# Altium PCB PCB2.PcbDoc
Units mil, origin at the board's own origin, x right, y up, seen from the top; angles counter-clockwise.
Board outline 1742.31 x 1309.24 mil, 2 copper layers (Top Layer, Bottom Layer); 23 components, 20 nets, 68 pads, 0 vias.
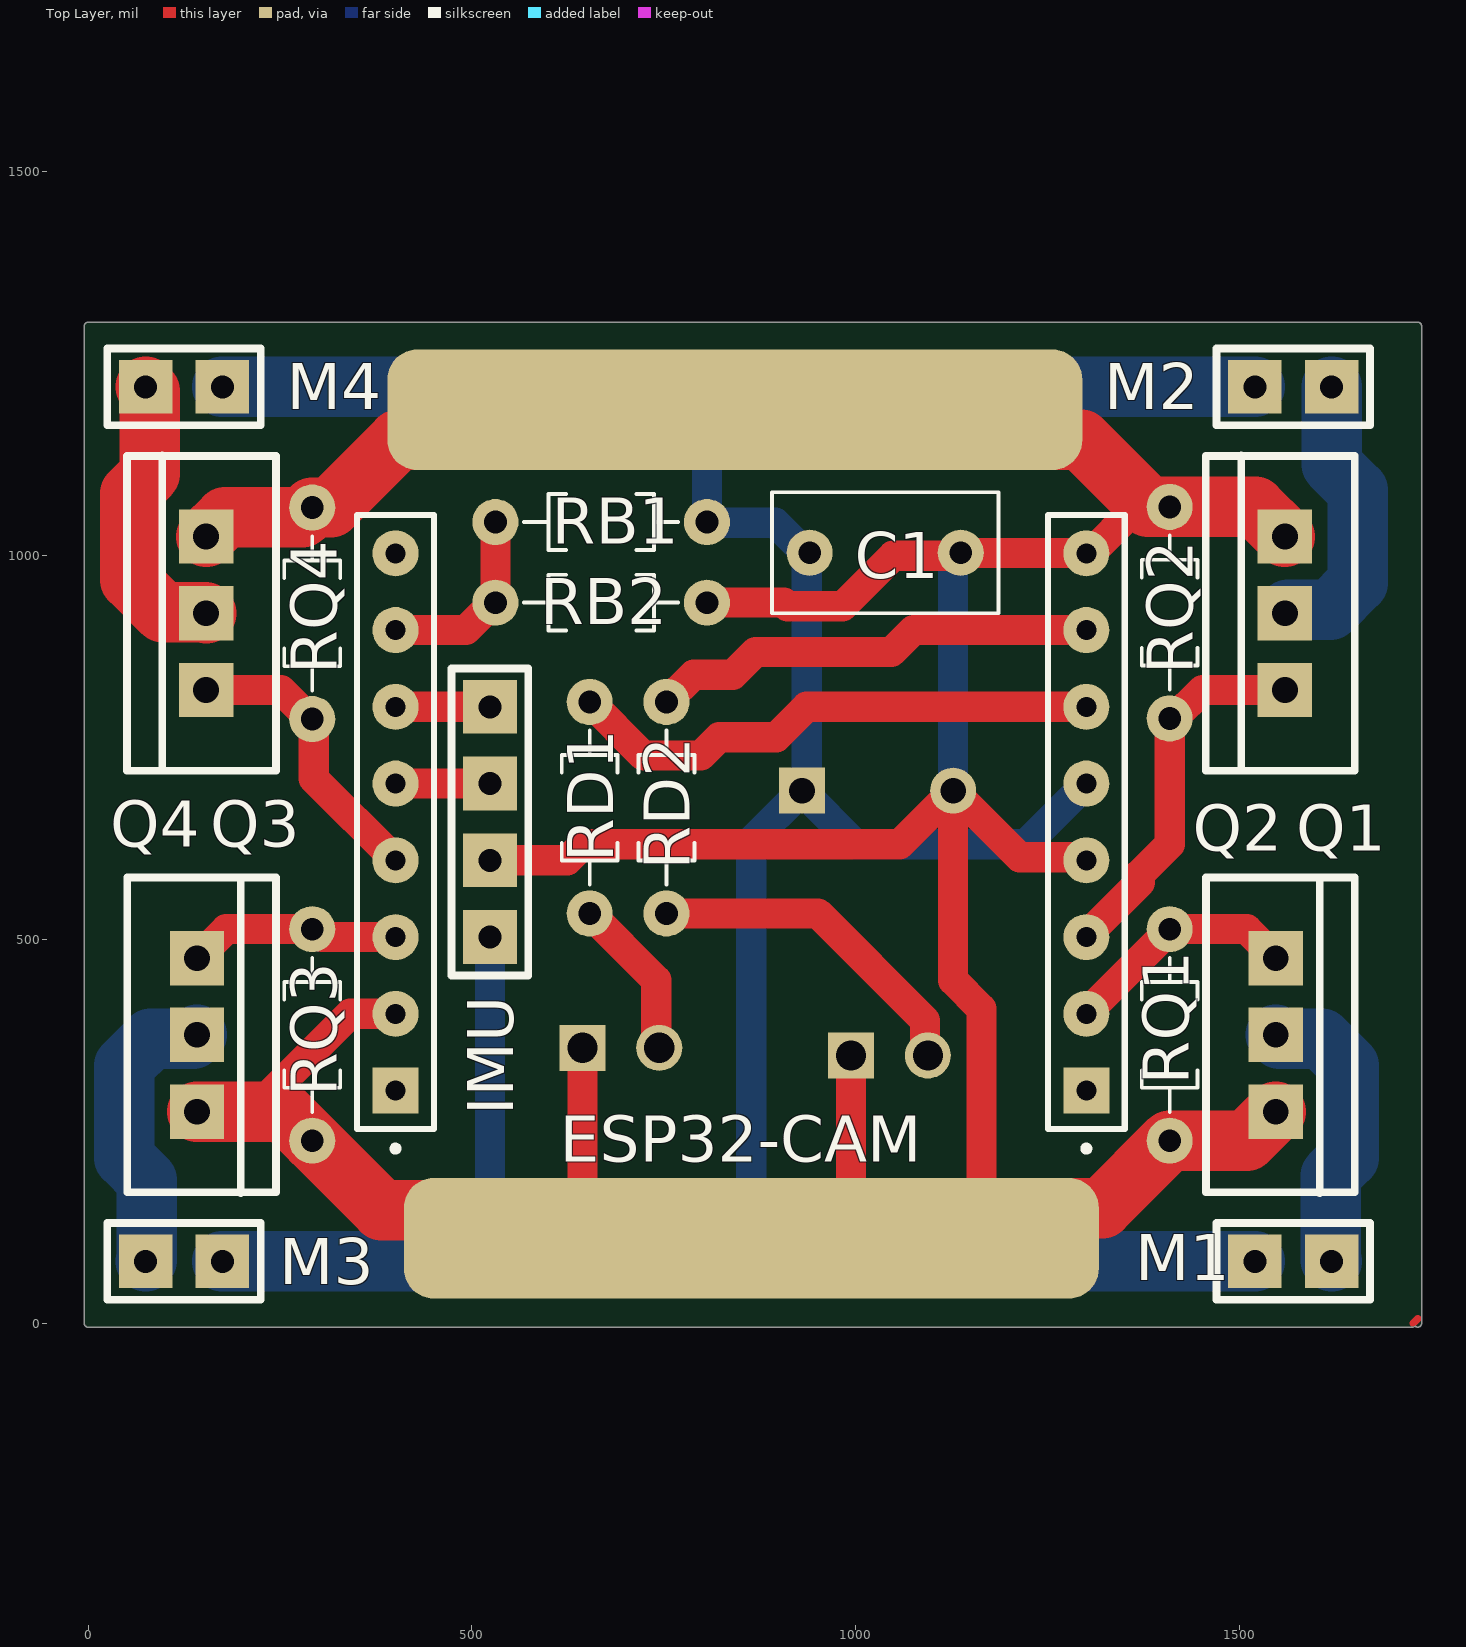
[diagram p0: Top Layer view]
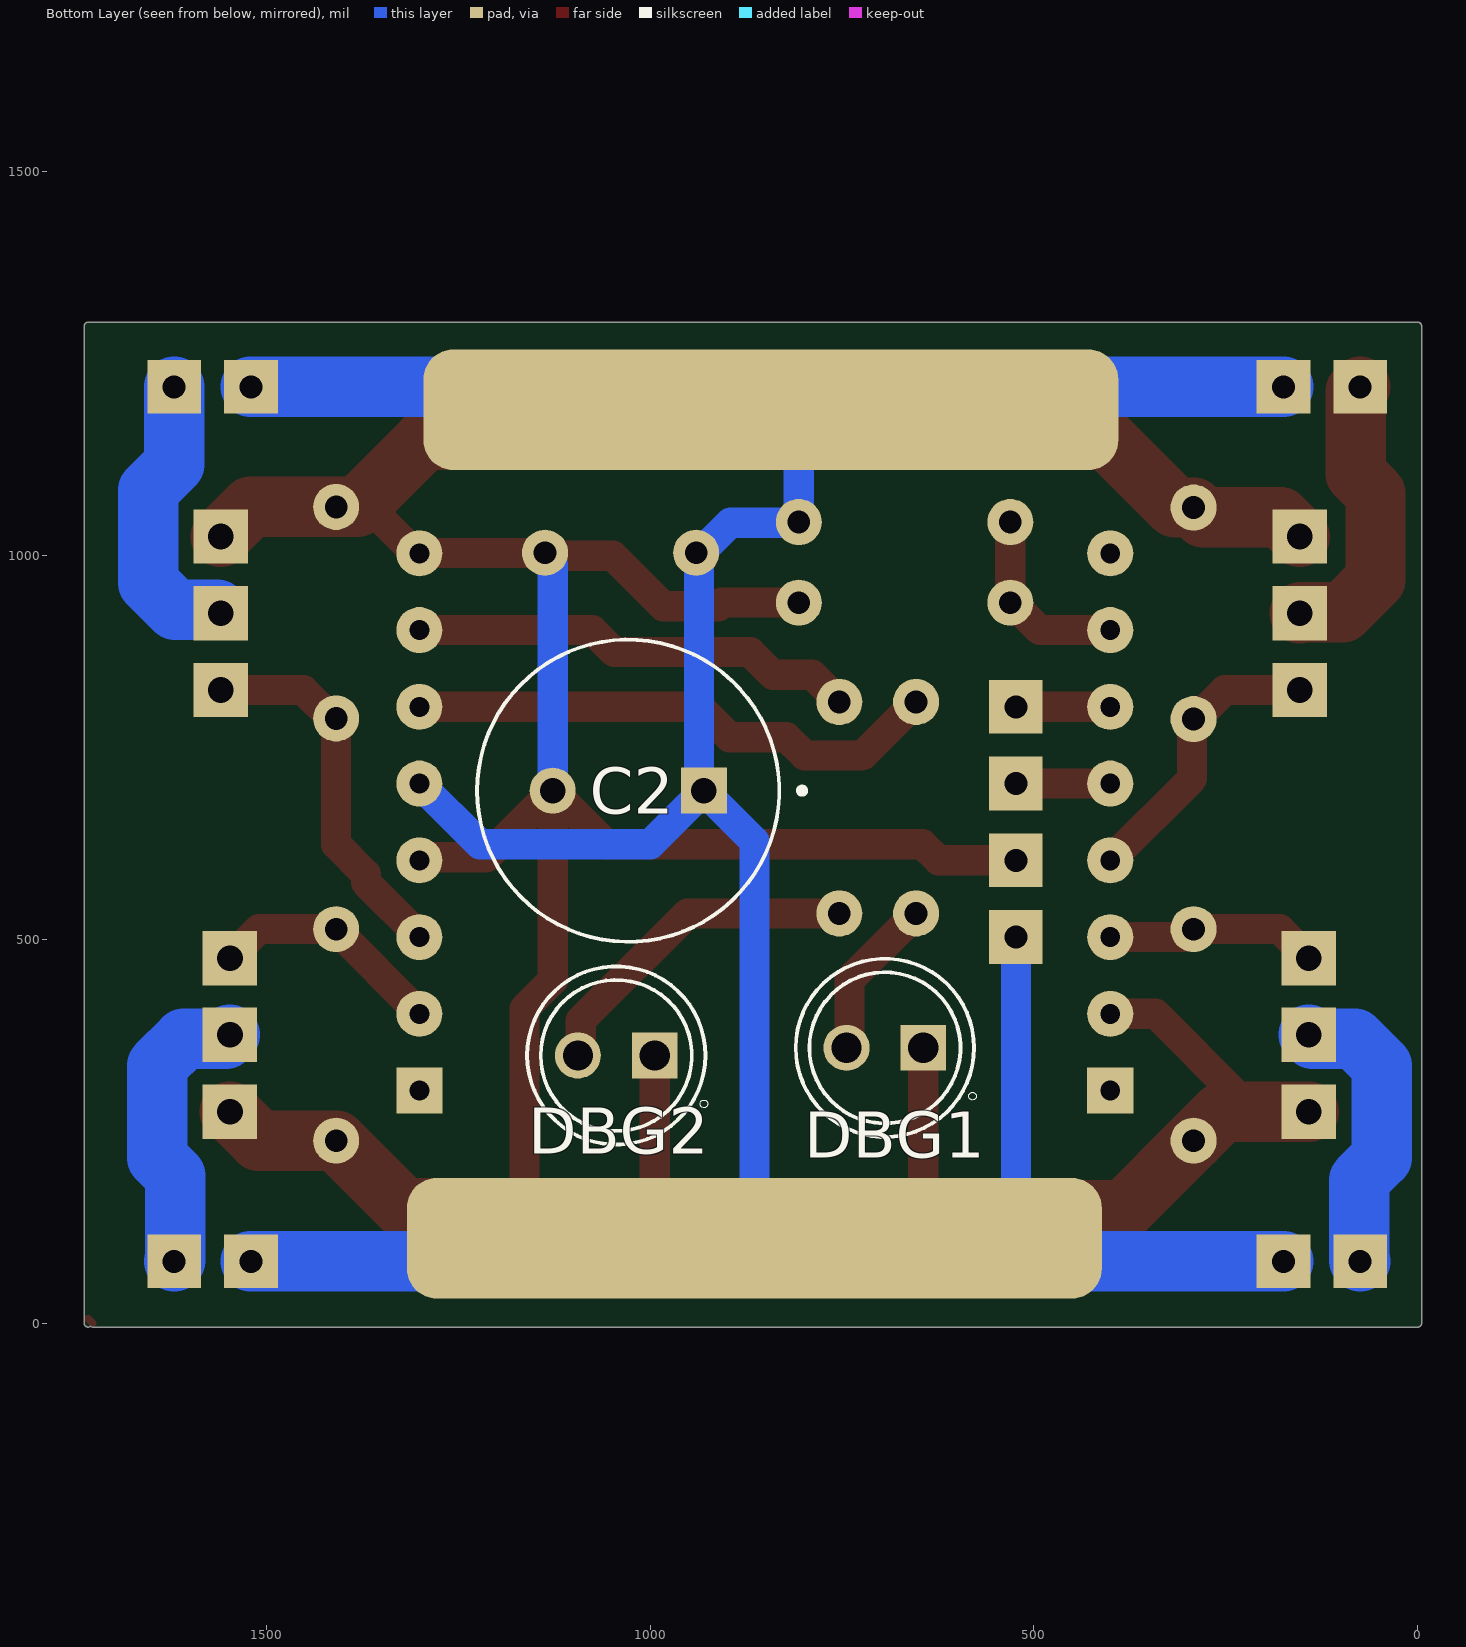
[diagram p1: Bottom Layer view, seen from below]

## Layer stack, top to bottom
Top Solder: solder mask 0.4, Solder Resist, Dk 3.5
Top Layer: signal copper 1.4
Dielectric 1: dielectric 12.6, FR-4, Dk 4.8
Bottom Layer: signal copper 1.4
Bottom Solder: solder mask 0.4, Solder Resist, Dk 3.5

## Board outline
0,-5.01 cw(c0,0) -5.01,0 -5.01,1299.21 cw(c0,1299.21) 0,1304.23 1732.28,1304.23 cw(c1732.28,1299.21) 1737.3,1299.21 1737.3,0 cw(c1732.28,0) 1729.35,-4.07 1726.43,-5.01

## Design rules (kind name [scope] priority, off if disabled: settings)
Clearance [All] p1: gap=20 ignorepadtopadclearanceinfootprint=FALSE
PolygonConnect [All] p1: connectstyle=Relief reliefconductorwidth=10 reliefentries=4 polygonreliefangle="90 Angle" airgapwidth=10
RoutingVias [All] p1: holewidth=28 width=50 viastyle="Through Hole" minholewidth=28 minwidth=50 maxholewidth=28 maxwidth=50
SolderMaskExpansion [All] p1: expansion=4 istentingtop=FALSE
SupplyNets "Schematic Supply Nets" [InNet('GND')] p1: voltage=0.000
Width [All] p1: maxlimit=118.11 minlimit=39.37 preferedwidth=78.74 minimp=50.000000 maximp=50.000000 favimp=50.000000
30 further rules are at their usual default settings.

## Components (designator, comment, footprint, x,y, rotation, side; value= is the part's Value field where it differs from the comment)
C1 "100uF" CAP_RDER73A104K5E1H03A 1038.54,1003.9 r0 top
C2 "100nF" CAPPRD500W60D1000H2000 1028.54,693.9 r0 bottom
DBG1 "WP7113ID" LED_WP7113ID 694.13,358.9 r0 bottom
DBG2 "WP7113ID" LED_WP7113ID 1044.13,348.9 r0 bottom
ESP32-CAM "SS-108-T-2" SAMTEC_SS-108-T-2 400.59,303.15 r270 top
IMU "CONECTOR_4PIN" CON4 523.54,503.15 r90 top
M1 "CONECTOR_2PIN" CON2 1620.13,80.79 r180 top
M2 "CONECTOR_2PIN" CON2 1620.13,1220 r180 top
M3 "CONECTOR_2PIN" CON2 75,80.79 r0 top
M4 "CONECTOR_2PIN" CON2 75,1220 r0 top
Q1 "MOSFET-N" TO220 1547.44,475.79 r270 top
Q2 "MOSFET-N" TO220 1559.25,825 r90 top
Q3 "MOSFET-N" TO220 141.93,475.79 r270 top
Q4 "MOSFET-N" TO220 153.74,825 r90 top
RB1 "920k" RESAD700W45L350D185 668.54,1043.9 r180 top
RB2 "3.3M" RESAD700W45L350D185 668.54,938.9 r0 top
RD1 "110 Ohms" RESAD700W45L350D185 653.54,671.69 r90 top
RD2 "110 Ohms" RESAD700W45L350D185 753.54,671.69 r90 top
RQ1 "10K" RESAD700W45L350D185 1409.13,375.79 r90 top
RQ2 "10K" RESAD700W45L350D185 1409.13,925.79 r270 top
RQ3 "10K" RESAD700W45L350D185 292.05,375.79 r90 top
RQ4 "10K" RESAD700W45L350D185 292.05,925 r270 top
? "SS-108-T-2" SAMTEC_SS-108-T-2 1300.59,303.15 r270 top

## Footprints (in the part's own frame and the unit in brackets; to place one, negate y for a bottom-side part, rotate by r counter-clockwise, add the part's x,y. Pads: shape width x height; smd on the part's side, far side on the other; paste and mask are expansions set on the pad)
CAP_RDER73A104K5E1H03A [mil]
  round 60 hole 29.53: 1(-98.43,0) 2(98.43,0)
  silkscreen extent -148,-79 148,79
CAPPRD500W60D1000H2000 [mil]
  round 60 hole 33.46: N(98.43,0)
  rect 60x60 hole 33.46: P(-98.43,0)
  silkscreen extent -230,-197 197,197, body extent -196,-197 197,197, height 787
CON2 [mil]
  rect 70x70 hole 30: 1(0,0) 2(100,0)
  silkscreen extent -50,-50 150,50, body extent -42,-47 143,45, height 519
CON4 [mil]
  rect 70x70 hole 30: 1(0,0) 2(100,0) 3(200,0) 4(300,0)
  silkscreen extent -50,-50 350,50, body extent -50,-47 343,45, height 519
LED_WP7113ID [mil]
  round 60 hole 39.37: A(50,0)
  rect 59.37x59.37 / inner round 59.37 / far side rect 60x60 hole 39.37: C(-50,0)
  silkscreen extent -119,-116 116,116, body extent -98,-116 116,116, height 378
RESAD700W45L350D185 [mil]
  round 60 hole 29.53: 1(-137.8,0) 2(137.8,0)
  silkscreen extent -100,-36 100,36, body extent -147,-36 147,36, height 73
SAMTEC_SS-108-T-2 [mil]
  rect 60x60 hole 25.98: 01(0,0)
  round 60 hole 25.98: 02(-100,0) 03(-200,0) 04(-300,0) 05(-400,0) 06(-500,0) 07(-600,0) 08(-700,0)
  silkscreen extent -750,-50 80,50
TO220 [mm]
  rect 1.8x1.8 hole 0.85: 1(0,0) 2(2.54,0) 3(5.08,0)
  silkscreen extent -2.67,-2.31 7.77,2.62, body extent -2.41,-2.12 7.49,2.38, height 20.66

## Part data
C1: library part RDER73A104K5E1H03A, "Lead Capacitor X7R_EIA_ with Capacitance: 0.10F and Rated Voltage: 1000Vdc", Package="Radial Murata", Availability=Unavailable, MF=Murata, MP=RDER73A104K5E1H03A, Price=None, SnapEDA_Link=https://www.snapeda.com/parts/RDER73A104K5E1H03A/Murata/view-part/4545952/?ref=snap
C2: library part EEUFC2A470, "47F 100V Aluminum Electrolytic Capacitors Radial, Can", Package="RADIAL-2 Panasonic", Availability="In Stock", Check_prices=https://www.snapeda.com/parts/EEU-FC2A470/Panasonic%20Electronic%20Components/view-part/564661/?ref=eda, MF="Panasonic Electronic", MP=EEU-FC2A470, Price=None, SnapEDA_Link=https://www.snapeda.com/parts/EEU-FC2A470/Panasonic%20Electronic%20Components/view-part/564661/?ref=snap
DBG1 DBG2: "Red 617nm LED Indication - Discrete 2V Radial", Package="Radial Kingbright", Availability="In Stock", Check_prices=https://www.snapeda.com/parts/WP7113ID/Kingbright/view-part/?ref=eda, MF=Kingbright, MP=WP7113ID, Price=None, Purchase-URL=https://pricing.snapeda.com/search/part/WP7113ID/?ref=eda, SnapEDA_Link=https://www.snapeda.com/parts/WP7113ID/Kingbright/view-part/?ref=snap
ESP32-CAM ?: "SS Series .100 Single Row Screw Machine Socket Strip", Package=None, Availability=Bad, Check_prices=https://www.snapeda.com/parts/SS-108-T-2/Samtec/view-part/3323909/?ref=eda, MF=Samtec, MP=SS-108-T-2, Price=None, SnapEDA_Link=https://www.snapeda.com/parts/SS-108-T-2/Samtec/view-part/3323909/?ref=snap
Q1 Q2 Q3 Q4: "N-Channel MOSFET"
RB1 RB2 RD1 RD2 RQ1 RQ2 RQ3 RQ4: library part 3-1623927-1, "1 MOhms Â±5% 0.25W, 1/4W Through Hole Resistor Axial - Carbon Film", Package=None, Check_prices=https://www.snapeda.com/parts/3-1623927-1/TE+Connectivity/view-part/?ref=eda, MF="TE Connectivity", MP=3-1623927-1, SnapEDA_Link=https://www.snapeda.com/parts/3-1623927-1/TE+Connectivity/view-part/?ref=snap

## Free pads (board coordinates)
  rrect50% 905.51x157.48 smd: 25(842.72,1190.2) 25(864.13,110.79)
  rrect50% 905.51x157.48 smd far side: 25(842.72,1190.2) 25(864.13,110.79)

## Nets (pads, with @x,y where several pads share a name; then routed paths per layer and width w, separated by ;. In a path a pad name is that pad's centre, name@x,y a point inside that pad or via, vN(x,y) a via of type N, cw(c..) or ccw(c..) an arc to the next point about the centre after c; other vN are vias at no path point)
3.3V: ?.01
5V: ESP32-CAM.01
GND: ?.04 ?.08 C1.2 C2.N DBG1.C DBG2.C ESP32-CAM.02 IMU.2 pad.25@842.72,1190.2 pad.25@864.13,110.79 Q1.3 Q2.3 Q3.3 Q4.3 RB2.2 RQ1.1 RQ2.1 RQ3.1 RQ4.1 | length 6377.1
  Top Layer w39.37: 214.13,275.79 234.19,295.85 341.5,403.15 ESP32-CAM.02 ; IMU.2 624.25,603.15 645.31,624.21 1057.28,624.21 C2.N ; pad.25@644.13,168.34 DBG1.C ; RB2.2 906.57,938.9 911.25,934.21 982.96,934.21 1048.7,999.95 1133.02,999.95 C1.2 1137.34,1003.52 1300.22,1003.52 ?.08 1306.17,1003.15 1362.66,1059.64 1405.19,1059.64 RQ2.1 ; pad.25@864.13,110.79 994.13,110.79 1106.26,110.79 1163.82,168.34 1163.82,409.9 1126.97,446.75 C2.N ; pad.25@994.13,168.34 DBG2.C ; ?.04 1296.64,607.1 1213.77,607.1 C2.N
  Top Layer w78.74: Q3.3 214.13,275.79 254.25,275.79 RQ3.1 382.7,147.34 pad.25@644.13,147.34 ; Q4.3 178.74,1050 279.25,1050 RQ4.1 316.14,1062.8 404.17,1150.83 1177.36,1150.83 pad.25@1216.73,1190.2 ; pad.25@842.72,1190.2 1177.36,1190.2 1216.73,1150.83 1294.09,1150.83 1381.34,1063.58 RQ2.1 1520.67,1063.58 Q2.3 ; pad.25@994.13,150.16 1106.26,150.16 1163.82,150.16 1321.3,150.16 RQ1.1 1509.65,237.99 Q1.3
  Bottom Layer w39.37: C2.N 1126.97,988.32 1136.97,998.32 C1.2
GPIO01(DBG2): ?.07 RD2.2 | length 585.8
  Top Layer w39.37: RD2.2 789.06,845 840,845 869.45,874.45 1046.52,874.45 1075.22,903.15 ?.07
GPIO02(VBAT): ESP32-CAM.07 RB1.2 RB2.1 | length 250
  Top Layer w39.37: ESP32-CAM.07 492.25,903.15 528,938.9 RB2.1 RB1.2
GPIO03(DBG1): ?.06 RD1.2 | length 702.2
  Top Layer w39.37: RD1.2 722.24,740.79 723.69,740.79 724.68,739.8 798.67,739.8 822.45,763.58 896.44,763.58 936,803.15 ?.06
GPIO04: ESP32-CAM.08
GPIO10(M2): ?.03 Q2.1 RQ2.2 | length 495.2
  Top Layer w39.37: ?.03 1300.59,504.6 1370.28,574.29 1370.28,585.28 1409.13,624.13 RQ2.2 1414.72,787.99 1451.72,825 Q2.1
GPIO12(M3): ESP32-CAM.03 Q3.1 RQ3.2 | length 278.6
  Top Layer w39.37: Q3.1 179.72,513.58 RQ3.2 294.8,513.58 305.23,503.15 ESP32-CAM.03
GPIO13(M4): ESP32-CAM.04 Q4.1 RQ4.2 | length 383
  Top Layer w39.37: Q4.1 251.5,825 289.3,787.2 RQ4.2 293.99,785.26 293.99,709.75 ESP32-CAM.04
GPIO14(SDA): ESP32-CAM.06 IMU.4 | length 123
  Top Layer w39.37: ESP32-CAM.06 IMU.4
GPIO15(SCL): ESP32-CAM.05 IMU.3 | length 123
  Top Layer w39.37: ESP32-CAM.05 IMU.3
GPIO16(M1): ?.02 Q1.1 RQ1.2 | length 306.6
  Top Layer w39.37: ?.02 1300.59,404.09 1409.13,512.64 RQ1.2 ; RQ1.2@1411.88,513.58 1509.65,513.58 Q1.1
NetDBG1_A: DBG1.A RD1.1 | length 212.5
  Top Layer w39.37: RD1.1 740.31,447.13 740.31,362.72 DBG1.A
NetDBG2_A: DBG2.A RD2.1 | length 441.8
  Top Layer w39.37: RD2.1 951.02,533.9 1090.31,394.61 1090.31,352.72 DBG2.A
NetM1_1: M1.1 Q1.2 | length 376.6
  Bottom Layer w78.74: Q1.2 1552.64,370.59 1607.47,370.59 1642.24,335.81 1642.24,215.76 1618.87,192.39 1618.87,82.05 M1.1
NetM2_1: M2.1 Q2.2 | length 374
  Bottom Layer w78.74: Q2.2@1563.77,929.52 1618.6,929.52 1654.06,964.97 1654.06,1085.03 1620.13,1118.95 M2.1
NetM3_1: M3.1 Q3.2 | length 379
  Bottom Layer w78.74: M3.1 76.26,82.05 76.26,186.63 47.13,215.76 47.13,335.81 81.9,370.59 136.73,370.59 Q3.2
NetM4_1: M4.1 Q4.2 | length 381
  Top Layer w78.74: M4.1 80.63,1214.37 80.63,1106.72 55,1081.09 55,968.91 97.65,926.26 152.48,926.26 Q4.2
VBAT: ?.05 C1.1 C2.P IMU.1 M1.2 M2.2 M3.2 M4.2 pad.25@842.72,1190.2 pad.25@864.13,110.79 RB1.1 | length 4528.9
  Bottom Layer w39.37: IMU.1 523.54,168.34 pad.25@581.1,110.79 ; pad.25@842.72,1190.2 806.34,1153.82 RB1.1 807.2,1043.04 895.39,1043.04 934.54,1003.9 C1.1 936.17,999.95 936.17,699.95 C2.P ; pad.25@864.13,110.79 864.13,627.91 C2.P ; ?.05 1221.65,624.21 999.8,624.21 C2.P
  Bottom Layer w78.74: M3.2 pad.25@581.1,80.79 ; M4.2 812.91,1220 842.72,1190.2 872.52,1220 M2.2 ; pad.25@864.13,110.79 894.13,80.79 M1.2
copper on no net: | length 8.3
  Top Layer w10: 1726.43,0 1732.28,5.86